# Altium PCB petroskey.PcbDoc (part 2 of 2)
Units mm, origin at the board's own origin, x right, y up, seen from the top; angles counter-clockwise.
Board outline 288 x 108 mm, 2 copper layers (Top Layer, Bottom Layer), stack 1.57 mm thick; 441 components, 333 nets, 1412 pads, 0 vias.
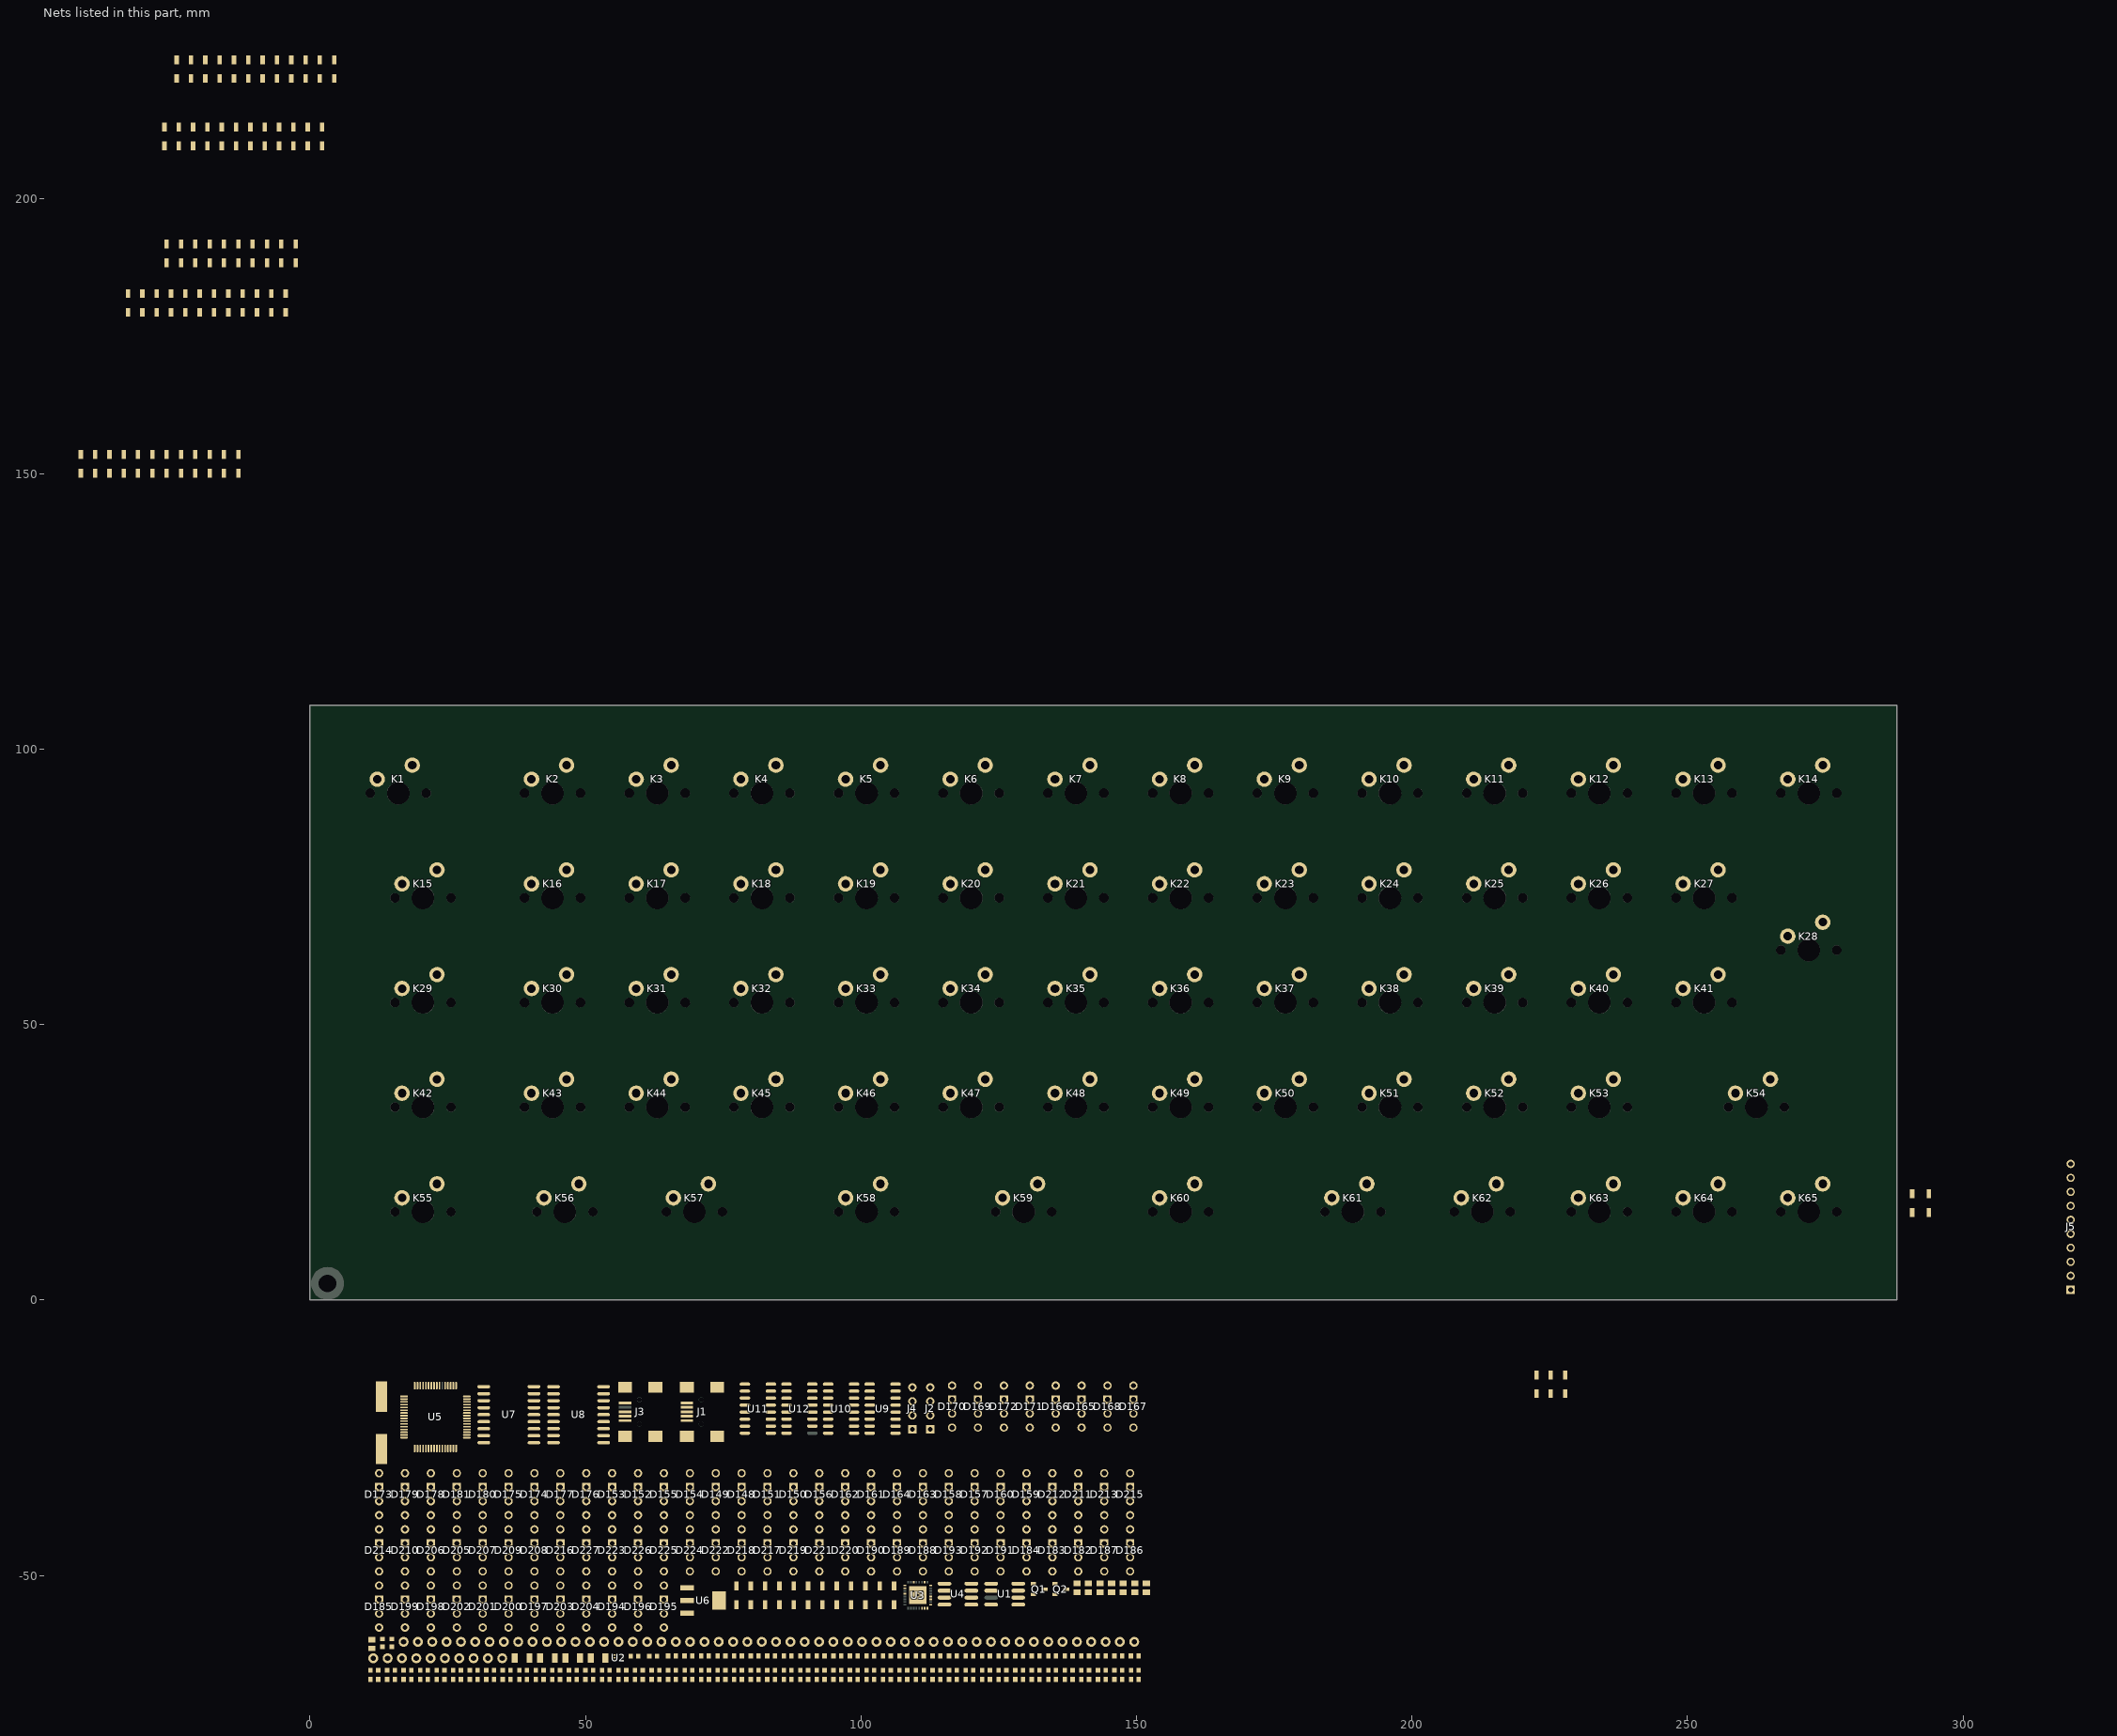
[diagram p2: the nets of this part, all layers, seen from the top]

## Part data
C1: library part "Cap Pol1", "Ceramic X7R 16V"
C2 C3 C4 C5 C7 C8 C9 C10 C12 C17 C18 C19 C20 C23 C25 C26 C27 C28 C29 C30 C31 C32 C33 C34 C35 C36 C37 C38 C39 C40 C41 C42 C43 C44 C45 C46 C47 C48 C49: library part Cap, "Ceramic X7R 50V"
C6 C22 C24: library part "Cap Pol1", "Ceramic X5R 25V"
C11 C13: library part Cap, "Ceramic NP0 +/- 0.1"
C14 C21: library part Cap, "Ceramic X7R 16V"
C15 C16: library part Cap, "Ceramic 6.3V X7R"
C50 C51 C52 C53: library part C, "CER 50V X7R"
D1: library part Diode, "Diode Schottky  low Vf, If 1A (PMEG3010ER; MBRX120LF)"
D2 D3: library part LED0, "LED Green"
D4 D5 D6 D7 D8 D9 D10 D11 D12 D13 D14 D15 D16 D17 D18 D19 D20 D21 D22 D23 D24 D25 D26 D27 D28 D29 D30 D31 D32 D33 D34 D35 D36 D37 D38 D39 D40 D41 D42 D43 D44 D45 D46 D47 D48 D49 D50 D51 D52 D53 D54 D55 D56 D57 D58 D59 D60 D61 D62 D63 D64 D65 D66 D67 D68 D69 D70 D71 D72 D73 D74 D75 D76 D77: library part diode_small, "Diode Schottky  low Vf, If 1A (PMEG3010ER; MBRX120LF)"
D148 D149 D150 D151 D152 D153 D154 D155 D156 D157 D158 D159 D160 D161 D162 D163 D164 D165 D166 D167 D168 D169 D170 D171 D172 D173 D174 D175 D176 D177 D178 D179 D180 D181 D182 D183 D184 D185 D186 D187 D188 D189 D190 D191 D192 D193 D194 D195 D196 D197 D198 D199 D200 D201 D202 D203 D204 D205 D206 D207 D208 D209 D210 D211 D212 D213 D214 D215 D216 D217 D218 D219 D220 D221 D222 D223 D224 D225 D226 D227: library part Led_RGB_THD, "Led RGB Thrue Hole"
J1: library part USB_Con_Type_B_mini_SMT, "Mini USB SMT Type B 5 Contacts"
J2 J4: library part "Header 4", "Pin Header, 1x4, 2.54mm."
J3: library part USB_Con_Type_B_mini_SMT, "Mini USB SMT Type B 5 Contacts (WE 65100516121)"
J5: library part "Header 10", "Header, 10-Pin"
K1 K2 K3 K4 K5 K6 K7 K8 K9 K10 K11 K12 K13 K14 K15 K16 K17 K18 K19 K20 K21 K22 K23 K24 K25 K26 K27 K28 K29 K30 K31 K32 K33 K34 K35 K36 K37 K38 K39 K40 K41 K42 K43 K44 K45 K46 K47 K48 K49 K50 K51 K52 K53 K54 K55 K56 K57 K58 K59 K60 K61 K62 K63 K64 K65: library part SWITCH-RA, "Tactile Switch Right Angle 6x6"
L1 L2 L3 L4 L6 L7 L9: library part Inductor, "WE 742792022"
L5: library part "BEAD_ FERRITE", "Ferrite Beat (WE 7427927218)"
L8: library part Inductor, "Inductor"
Q1 Q2: "BJT NPN"
R1 R2 R3 R4 R5 R6 R7 R9 R10 R11 R12 R13 R14 R15 R16 R17 R18 R19 R20 R21 R22 R23 R24 R25 R26 R27 R28 R29 R30 R31 R32 R33 R34 R35 R36 R37 R38 R39 R40 R41 R42 R43 R44 R45 R46 R47 R48 R49 R50 R51 R52 R53 R54 R55 R56 R57 R58 R59 R60 R61 R62 R63 R64 R65 R66 R67 R68 R69 R70 R71 R72 R73 R74: library part Res1, "Resistor"
R8: library part Resistor_ST, "Resistor"
R75: library part R_0, "Resistor"
Tp1 Tp2 Tp3 Tp4 Tp5 Tp6 Tp7 Tp8 Tp9 Tp10 Tp11 Tp12 Tp13 Tp14 Tp15 Tp16 Tp17 Tp18 Tp19 Tp20 Tp21 Tp22 Tp23 Tp24 Tp25 Tp26 Tp27 Tp28 Tp29 Tp30 Tp31 Tp32 Tp33 Tp34 Tp35 Tp36 Tp37 Tp38 Tp39 Tp40 Tp41 Tp42 Tp43 Tp44 Tp45 Tp46 Tp47 Tp48 Tp49 Tp50 Tp51 Tp52 Tp53 Tp54 Tp55 Tp56 Tp57 Tp58 Tp59 Tp60 Tp61 Tp62: library part Test_point, "Test point"
U1: library part LM75, "Temperature sensor"
U2: library part TVS_Diode_Array
U3: "Serial TTL 232 <-> USB (QFN-32)"
U4: library part EEPROM-SOIC8, "EEPROM"
U6: library part LM1117-FIXED-OUT, "LM1117 LDO Fixed output"
U7 U8: "BJT Darlington array"
U9 U10 U11 U12: library part 74HC595_27, "8-Bit Serial-Input/Serial or Prallel-Output Shift Register with Latched 3-State Outputs"
Y1: library part CRYSTAL-2p, "Crystall"

## Free pads (board coordinates)
  round 6 hole 3.2: Hole(3.175,3)

## Nets (pads, with @x,y where several pads share a name; then routed paths per layer and width w, separated by ;. In a path a pad name is that pad's centre, name@x,y a point inside that pad or via, vN(x,y) a via of type N, cw(c..) or ccw(c..) an arc to the next point about the centre after c; other vN are vias at no path point)
3V3OUT: C10.1 U3.1 U3.16
+3.3V: C4.2 C24.1 C25.2 C50.1 C51.1 C52.1 C53.1 D3.1 L6.1 L9.1 Q1.3 R2.1 R3.1 R4.1 R75.1 Tp3.1 U1.8 U6.2 U6.4 U7.10 U8.10 U9.10 U9.16 U10.10 U10.16 U11.10 U11.16 U12.10 U12.16
+5V: C1.1 C2.1 C5.2 C9.2 C22.1 C23.2 D1.1 D2.1 L1.1 R1.1 Tp4.1 U2.5 U6.3
FTDIUSB_N: J3.2 U3.15
FTDIUSB_P: J3.3 U3.14
GND: C1.2 C2.2 C3.2 C4.1 C5.1 C6.2 C7.2 C8.2 C9.1 C10.2 C11.2 C12.1 C13.2 C14.2 C15.1 C16.1 C17.2 C18.2 C19.2 C20.2 C21.1 C22.2 C23.1 C24.2 C25.1 C50.2 C51.2 C52.2 C53.2 J1.5 J3.5 L2.1 L5.2 L7.1 Q2.2 R6.2 R8.2 R24.1 R26.2 R34.1 R35.1 Tp5.1 Tp6.1 U1.4 U1.5 U1.6 U1.7 U2.2 U3.4 U3.17 U3.20 U3.24 U3.26 U3.GND_PAD U4.1 U4.2 U4.3 U4.4 U4.7 U5.12 U5.18 U5.63 U6.1 U7.9 U8.9 U9.8 U10.8 U11.8 U12.8
NetC3_1: C3.1 J1.1 L1.2
NetC7_1: C7.1 J3.1 L3.2
NetC11_1: C11.1 R22.2 U5.5 Y1.1
NetC13_1: C13.1 R22.1 U5.6 Y1.2
NetC15_2: C15.2 U5.47
NetC16_2: C16.2 U5.31
NetC26_1: C26.1 K1.1 K13.1 K25.1 K37.1 K49.1 K61.1 R36.1 Tp8.1
NetC26_2: C26.2 R36.2 U5.26
NetC27_1: C27.1 K2.1 K14.1 K26.1 K38.1 K50.1 K62.1 R37.1 Tp9.1
NetC27_2: C27.2 R37.2 U5.27
NetC28_1: C28.1 K3.1 K15.1 K27.1 K39.1 K51.1 K63.1 R38.1 Tp10.1
NetC28_2: C28.2 R38.2 U5.55
NetC29_1: C29.1 K4.1 K16.1 K28.1 K40.1 K52.1 K64.1 R39.1 Tp11.1
NetC29_2: C29.2 R39.2 U5.56
NetC30_1: C30.1 K5.1 K17.1 K29.1 K41.1 K53.1 K65.1 R40.1 Tp12.1
NetC30_2: C30.2 R40.2 U5.57
NetC31_1: C31.1 K6.1 K18.1 K30.1 K42.1 K54.1 R41.1 Tp13.1
NetC31_2: C31.2 R41.2 U5.58
NetC32_1: C32.1 K7.1 K19.1 K31.1 K43.1 K55.1 R42.1 Tp14.1
NetC32_2: C32.2 R42.2 U5.59
NetC33_1: C33.1 K8.1 K20.1 K32.1 K44.1 K56.1 R43.1 Tp15.1
NetC33_2: C33.2 R43.2 U5.61
NetC34_1: C34.1 K9.1 K21.1 K33.1 K45.1 K57.1 R44.1 Tp16.1
NetC34_2: C34.2 R44.2 U5.62
NetC35_1: C35.1 K10.1 K22.1 K34.1 K46.1 K58.1 R45.1 Tp17.1
NetC35_2: C35.2 R45.2 U5.33
NetC36_1: C36.1 K11.1 K23.1 K35.1 K47.1 K59.1 R46.1 Tp18.1
NetC36_2: C36.2 R46.2 U5.34
NetC37_1: C37.1 K12.1 K24.1 K36.1 K48.1 K60.1 R47.1 Tp19.1
NetC37_2: C37.2 R47.2 U5.35
NetC38_1: C38.1 D4.1 D5.1 D6.1 D7.1 D8.1 D9.1 D10.1 D11.1 D12.1 D13.1 D14.1 D15.1 R48.1 Tp20.1
NetC38_2: C38.2 R48.2 U5.8
NetC39_1: C39.1 D16.1 D17.1 D18.1 D19.1 D20.1 D21.1 D22.1 D23.1 D24.1 D25.1 D26.1 D27.1 R49.1 Tp21.1
NetC39_2: C39.2 R49.2 U5.9
NetC40_1: C40.1 D28.1 D29.1 D30.1 D31.1 D32.1 D33.1 D34.1 D35.1 D36.1 D37.1 D38.1 D39.1 R50.1 Tp22.1
NetC40_2: C40.2 R50.2 U5.10
NetC41_1: C41.1 D40.1 D41.1 D42.1 D43.1 D44.1 D45.1 D46.1 D47.1 D48.1 D49.1 D50.1 D51.1 R51.1 Tp23.1
NetC41_2: C41.2 R51.2 U5.11
NetC42_1: C42.1 D52.1 D53.1 D54.1 D55.1 D56.1 D57.1 D58.1 D59.1 D60.1 D61.1 D62.1 D63.1 R52.1 Tp24.1
NetC42_2: C42.2 R52.2 U5.24
NetC43_1: C43.1 D64.1 D65.1 D66.1 D67.1 D68.1 D69.1 D70.1 D71.1 D72.1 D73.1 D74.1 D75.1 R53.1 Tp25.1
NetC43_2: C43.2 R53.2 U5.25
NetC44_1: C44.1 D76.1 D77.1 R54.1 Tp26.1
NetC44_2: C44.2 R54.2 U5.37
NetC45_1: C45.1 R55.1 Tp27.1
NetC45_2: C45.2 R55.2 U5.38
NetC46_1: C46.1 R56.1 Tp28.1
NetC46_2: C46.2 R56.2 U5.39
NetC47_1: C47.1 R57.1 Tp29.1
NetC47_2: C47.2 R57.2 U5.40
NetC48_1: C48.1 R58.1 Tp30.1
NetC48_2: C48.2 R58.2 U5.51
NetC49_1: C49.1 R59.1 Tp31.1
NetC49_2: C49.2 R59.2 U5.52
NetD1_2: D1.2 L4.1
NetD2_2: D2.2 R34.2
NetD3_2: D3.2 R35.2
NetD4_2: D4.2 K1.2
NetD5_2: D5.2 K2.2
NetD6_2: D6.2 K3.2
NetD7_2: D7.2 K4.2
NetD8_2: D8.2 K5.2
NetD9_2: D9.2 K6.2
NetD10_2: D10.2 K7.2
NetD11_2: D11.2 K8.2
NetD12_2: D12.2 K9.2
NetD13_2: D13.2 K10.2
NetD14_2: D14.2 K11.2
NetD15_2: D15.2 K12.2
NetD16_2: D16.2 K13.2
NetD17_2: D17.2 K14.2
NetD18_2: D18.2 K15.2
NetD19_2: D19.2 K16.2
NetD20_2: D20.2 K17.2
NetD21_2: D21.2 K18.2
NetD22_2: D22.2 K19.2
NetD23_2: D23.2 K20.2
NetD24_2: D24.2 K21.2
NetD25_2: D25.2 K22.2
NetD26_2: D26.2 K23.2
NetD27_2: D27.2 K24.2
NetD28_2: D28.2 K25.2
NetD29_2: D29.2 K26.2
NetD30_2: D30.2 K27.2
NetD31_2: D31.2 K28.2
NetD32_2: D32.2 K29.2
NetD33_2: D33.2 K30.2
NetD34_2: D34.2 K31.2
NetD35_2: D35.2 K32.2
NetD36_2: D36.2 K33.2
NetD37_2: D37.2 K34.2
NetD38_2: D38.2 K35.2
NetD39_2: D39.2 K36.2
NetD40_2: D40.2 K37.2
NetD41_2: D41.2 K38.2
NetD42_2: D42.2 K39.2
NetD43_2: D43.2 K40.2
NetD44_2: D44.2 K41.2
NetD45_2: D45.2 K42.2
NetD46_2: D46.2 K43.2
NetD47_2: D47.2 K44.2
NetD48_2: D48.2 K45.2
NetD49_2: D49.2 K46.2
NetD50_2: D50.2 K47.2
NetD51_2: D51.2 K48.2
NetD52_2: D52.2 K49.2
NetD53_2: D53.2 K50.2
NetD54_2: D54.2 K51.2
NetD55_2: D55.2 K52.2
NetD56_2: D56.2 K53.2
NetD57_2: D57.2 K54.2
NetD58_2: D58.2 K55.2
NetD59_2: D59.2 K56.2
NetD60_2: D60.2 K57.2
NetD61_2: D61.2 K58.2
NetD62_2: D62.2 K59.2
NetD63_2: D63.2 K60.2
NetD64_2: D64.2 K61.2
NetD65_2: D65.2 K62.2
NetD66_2: D66.2 K63.2
NetD67_2: D67.2 K64.2
NetD68_2: D68.2 K65.2
NetD69_2: D69.2
NetD70_2: D70.2
NetD71_2: D71.2
NetD72_2: D72.2
NetD73_2: D73.2
NetD74_2: D74.2
NetD75_2: D75.2
NetD76_2: D76.2
NetD77_2: D77.2
NetD78_2: 
NetD79_2: 
NetD80_2: 
NetD81_2: 
NetD82_2: 
NetD83_2: 
NetD84_2: 
NetD85_2: 
NetD86_2: 
NetD87_2: 
NetD88_2: 
NetD89_2: 
NetD90_2: 
NetD91_2: 
NetD92_2: 
NetD93_2: 
NetD94_2: 
NetD95_2: 
NetD96_2: 
NetD97_2: 
NetD98_2: 
NetD99_2: 
NetD100_2: 
NetD101_2: 
NetD102_2: 
NetD103_2: 
NetD104_2: 
NetD105_2: 
NetD106_2: 
NetD107_2: 
NetD108_2: 
NetD109_2: 
NetD110_2: 
NetD111_2: 
NetD112_2: 
NetD113_2: 
NetD114_2: 
NetD115_2: 
NetD116_2: 
NetD117_2: 
NetD118_2: 
NetD119_2: 
NetD120_2: 
NetD121_2: 
NetD122_2: 
NetD123_2: 
NetD124_2: 
NetD125_2: 
NetD126_2: 
NetD127_2: 
NetD128_2: 
NetD129_2: 
NetD130_2: 
NetD131_2: 
NetD132_2: 
NetD133_2: 
NetD134_2: 
NetD135_2: 
NetD136_2: 
NetD137_2: 
NetD138_2: 
NetD139_2: 
NetD140_2: 
NetD141_2: 
NetD142_2: 
NetD143_2: 
NetD144_2: 
NetD145_2: 
NetD146_2: 
NetD147_2: 
NetD148_1: D148.1 D149.1 D150.1 D151.1 D152.1 D153.1 D154.1 D155.1 D156.1 D157.1 D158.1 D159.1 D160.1 D161.1 D162.1 D163.1 R60.1 Tp32.1
NetD148_2: D148.2 D164.2 D180.2 D196.2 D212.2 Tp47.1 U7.11
NetD148_3: D148.3 D149.3 D150.3 D151.3 D152.3 D153.3 D154.3 D155.3 D156.3 D157.3 D158.3 D159.3 D160.3 D161.3 D162.3 D163.3 R61.1 Tp33.1
NetD148_4: D148.4 D149.4 D150.4 D151.4 D152.4 D153.4 D154.4 D155.4 D156.4 D157.4 D158.4 D159.4 D160.4 D161.4 D162.4 D163.4 R62.1 Tp34.1
NetD149_2: D149.2 D165.2 D181.2 D197.2 D213.2 Tp48.1 U7.12
NetD150_2: D150.2 D166.2 D182.2 D198.2 D214.2 Tp49.1 U7.13
NetD151_2: D151.2 D167.2 D183.2 D199.2 D215.2 Tp50.1 U7.14
NetD152_2: D152.2 D168.2 D184.2 D200.2 D216.2 Tp51.1 U7.15
NetD153_2: D153.2 D169.2 D185.2 D201.2 D217.2 Tp52.1 U7.16
NetD154_2: D154.2 D170.2 D186.2 D202.2 D218.2 Tp53.1 U7.17
NetD155_2: D155.2 D171.2 D187.2 D203.2 D219.2 Tp54.1 U7.18
NetD156_2: D156.2 D172.2 D188.2 D204.2 D220.2 Tp55.1 U8.11
NetD157_2: D157.2 D173.2 D189.2 D205.2 D221.2 Tp56.1 U8.12
NetD158_2: D158.2 D174.2 D190.2 D206.2 D222.2 Tp57.1 U8.13
NetD159_2: D159.2 D175.2 D191.2 D207.2 D223.2 Tp58.1 U8.14
NetD160_2: D160.2 D176.2 D192.2 D208.2 D224.2 Tp59.1 U8.15
NetD161_2: D161.2 D177.2 D193.2 D209.2 D225.2 Tp60.1 U8.16
NetD162_2: D162.2 D178.2 D194.2 D210.2 D226.2 Tp61.1 U8.17
NetD163_2: D163.2 D179.2 D195.2 D211.2 D227.2 Tp62.1 U8.18
NetD164_1: D164.1 D165.1 D166.1 D167.1 D168.1 D169.1 D170.1 D171.1 D172.1 D173.1 D174.1 D175.1 D176.1 D177.1 D178.1 D179.1 R63.1 Tp35.1
NetD164_3: D164.3 D165.3 D166.3 D167.3 D168.3 D169.3 D170.3 D171.3 D172.3 D173.3 D174.3 D175.3 D176.3 D177.3 D178.3 D179.3 R64.1 Tp36.1
NetD164_4: D164.4 D165.4 D166.4 D167.4 D168.4 D169.4 D170.4 D171.4 D172.4 D173.4 D174.4 D175.4 D176.4 D177.4 D178.4 D179.4 R65.1 Tp37.1
NetD180_1: D180.1 D181.1 D182.1 D183.1 D184.1 D185.1 D186.1 D187.1 D188.1 D189.1 D190.1 D191.1 D192.1 D193.1 D194.1 D195.1 R66.1 Tp38.1
NetD180_3: D180.3 R67.1 Tp39.1
NetD180_4: D180.4 D181.4 D182.4 D183.4 D184.4 D185.4 D186.4 D187.4 D188.4 D189.4 D190.4 D191.4 D192.4 D193.4 D194.4 D195.4 R68.1 Tp40.1
NetD181_3: D181.3 D182.3 D183.3 D184.3 D185.3 D186.3 D187.3 D188.3 D189.3 D190.3 D191.3 D192.3 D193.3 D194.3 D195.3
NetD196_1: D196.1 D197.1 D198.1 D199.1 D200.1 D201.1 D202.1 D203.1 D204.1 D205.1 D206.1 D207.1 D208.1 D209.1 D210.1 D211.1 R69.1 Tp41.1
NetD196_3: D196.3 D197.3 D198.3 D199.3 D200.3 D201.3 D202.3 D203.3 D204.3 D205.3 D206.3 D207.3 D208.3 D209.3 D210.3 D211.3 D212.3 D213.3 D214.3 D215.3 D216.3 D217.3 D218.3 D219.3 D220.3 D221.3 D222.3 D223.3 D224.3 D225.3 D226.3 D227.3 R70.1 R73.1 Tp42.1 Tp45.1
NetD196_4: D196.4 D197.4 D198.4 D199.4 D200.4 D201.4 D202.4 D203.4 D204.4 D205.4 D206.4 D207.4 D208.4 D209.4 D210.4 D211.4 R71.1 Tp43.1
NetD212_1: D212.1 D213.1 D214.1 D215.1 D216.1 D217.1 D218.1 D219.1 D220.1 D221.1 D222.1 D223.1 D224.1 D225.1 D226.1 D227.1 R72.1 Tp44.1
NetD212_4: D212.4 D213.4 D214.4 D215.4 D216.4 D217.4 D218.4 D219.4 D220.4 D221.4 D222.4 D223.4 D224.4 D225.4 D226.4 D227.4 R74.1 Tp46.1
NetJ1_4: J1.4 R8.1
NetJ1_Z1: J1.Z1 J1.Z2 J1.Z3 J1.Z4 L2.2
NetJ2_1: J2.1 J4.1 R23.2 U5.7
NetJ2_2: J2.2 R9.1
NetJ2_3: J2.3 R10.1
NetJ2_4: J2.4 R11.1
NetJ4_2: J4.2 R24.2 U5.60
NetJ4_3: J4.3 R12.1 R27.2
NetJ4_4: J4.4 R13.1 R25.2
NetJ5_1: J5.1 R14.1
NetJ5_2: J5.2 R15.1
NetJ5_3: J5.3 R16.1
NetJ5_4: J5.4 R17.1
NetJ5_5: J5.5 R18.1
NetJ5_6: J5.6 R19.1
NetJ5_7: J5.7 R20.1
NetJ5_8: J5.8 R21.1
NetJ5_9: J5.9 L6.2
NetJ5_10: J5.10 L7.2
NetL8_2: L8.2 U5.13
NetQ1_1: Q1.1 Q2.3 R1.2 R6.1
NetQ1_2: Q1.2 R7.1
NetQ2_1: Q2.1 R2.2 R5.1
NetR3_2: R3.2 R15.2 U1.1
NetR4_2: R4.2 R14.2 U1.2
NetR5_2: R5.2 U5.53
NetR9_2: R9.2
NetR10_2: R10.2
NetR11_2: R11.2
NetR12_2: R12.2 U3.30
NetR13_2: R13.2 U3.2
NetR16_2: R16.2 U5.14
NetR17_2: R17.2 U5.15
NetR18_2: R18.2 U5.20
NetR19_2: R19.2 U5.21
NetR20_2: R20.2 U5.22
NetR21_2: R21.2 U5.23
NetR25_1: R25.1 Tp1.1 U5.16
NetR26_1: R26.1 U5.28
NetR27_1: R27.1 Tp2.1 U5.17
NetR28_1: R28.1 R32.1 U4.5
NetR29_1: R29.1 R33.1 U4.6
NetR30_1: R30.1 U5.42
NetR30_2: R30.2
NetR31_1: R31.1 U5.43
NetR31_2: R31.2
NetR32_2: R32.2 U5.29
NetR33_2: R33.2 U5.30
NetR60_2: R60.2 U9.15
NetR61_2: R61.2 U9.1
NetR62_2: R62.2 U9.2
NetR63_2: R63.2 U9.3
NetR64_2: R64.2 U9.4
NetR65_2: R65.2 U9.5
NetR66_2: R66.2 U9.6
NetR67_2: R67.2 U9.7
NetR68_2: R68.2 U10.15
NetR69_2: R69.2 U10.1
NetR70_2: R70.2 U10.2
NetR71_2: R71.2 U10.3
NetR72_2: R72.2 U10.4
NetR73_2: R73.2 U10.5
NetR74_2: R74.2 U10.6
NetR75_2: R75.2 U5.41 U5.50 U9.11 U9.13 U10.11 U10.13 U11.11 U11.13 U12.13
NetU5_2: U5.2
NetU5_3: U5.3
NetU5_4: U5.4
NetU5_36: U5.36
NetU5_46: U5.46 U9.14
NetU5_49: U5.49 U9.12 U10.12 U11.12 U12.11 U12.12
NetU7_1: U7.1 U11.7
NetU7_2: U7.2 U11.6
NetU7_3: U7.3 U11.5
NetU7_4: U7.4 U11.4
NetU7_5: U7.5 U11.3
NetU7_6: U7.6 U11.2
NetU7_7: U7.7 U11.1
NetU7_8: U7.8 U11.15
NetU8_1: U8.1 U12.7
NetU8_2: U8.2 U12.6
NetU8_3: U8.3 U12.5
NetU8_4: U8.4 U12.4
NetU8_5: U8.5 U12.3
NetU8_6: U8.6 U12.2
NetU8_7: U8.7 U12.1
NetU8_8: U8.8 U12.15
NetU9_9: U9.9 U10.14
NetU10_7: U10.7
NetU10_9: U10.9 U11.14
NetU11_9: U11.9 U12.14
SHLD: J3.Z1 J3.Z2 J3.Z3 J3.Z4 L5.1
USB_N: J1.2 U2.1 U2.6 U5.44
USB_P: J1.3 R7.2 U2.3 U2.4 U5.45
VCC_USB: C6.1 C8.1 L3.1 L4.2 Tp7.1 U3.19
VDD: C12.2 C14.1 C17.1 C18.1 C19.1 C20.1 C21.2 L8.1 L9.2 R23.1 R28.2 R29.2 U4.8 U5.1 U5.19 U5.32 U5.48 U5.64
pads on no net: J1. J3. J3.4 K1.Hole K2.Hole K3.Hole K4.Hole K5.Hole K6.Hole K7.Hole K8.Hole K9.Hole K10.Hole K11.Hole K12.Hole K13.Hole K14.Hole K15.Hole K16.Hole K17.Hole K18.Hole K19.Hole K20.Hole K21.Hole K22.Hole K23.Hole K24.Hole K25.Hole K26.Hole K27.Hole K28.Hole K29.Hole K30.Hole K31.Hole K32.Hole K33.Hole K34.Hole K35.Hole K36.Hole K37.Hole K38.Hole K39.Hole K40.Hole K41.Hole K42.Hole K43.Hole K44.Hole K45.Hole K46.Hole K47.Hole K48.Hole K49.Hole K50.Hole K51.Hole K52.Hole K53.Hole K54.Hole K55.Hole K56.Hole K57.Hole K58.Hole K59.Hole K60.Hole K61.Hole K62.Hole K63.Hole K64.Hole K65.Hole U1.3 U3.3 U3.5 U3.6 U3.7 U3.8 U3.9 U3.10 U3.11 U3.12 U3.13 U3.18 U3.21 U3.22 U3.23 U3.25 U3.27 U3.28 U3.29 U3.31 U3.32 U5.54 U12.9

## Silkscreen, mask and mechanical layers (free items; w line width, h text height)
Outline:
  the board outline again, w0.2
Drawing:
  drawing of 651 lines, arcs and shapes, not listed
  text "270" at 141.5,144.625 h2.5
  text "13.5" at 4.111,130.625 h2.5
  text "10" at 28.75,126.625 h2.5
  text "9" at 3.944,124.625 h2.5
  text "14" at 28.611,120.625 h2.5
  text "5" at 52.944,120.625 h2.5
  text "1" at 72.222,120.625 h2.5
  text "18" at 99.75,120.625 h2.5
  text "9.5" at 30.306,115.625 h2.5
  text "288" at 141.5,114.625 h2.5
  text "1.6" at 30.663,102.349 h2.5 r49.4
  text "9" at -19.431,102.25 h2.5 r90
  text "6" at 32.569,93.75 h2.5 r90
  text "14" at -14.264,90.75 h2.5 r90
  text "18" at 310.875,90.75 h2.5 r90
  text "7" at 32.944,82.625 h2.5
  text "5" at -19.431,81.25 h2.5 r90
  text "7.9" at 260.181,79.8 h2.5 r90
  text "14.5" at 299.347,76.5 h2.5 r90
  text "37" at 310.597,62.25 h2.5 r90
  text "108" at -10.097,52.75 h2.5 r90
  text "90" at 320.597,52.75 h2.5 r90
  text "14.5" at 299.347,48 h2.5 r90
  text "18" at 310.875,33.75 h2.5 r90
  text "0.55" at 114.208,25.292 h2.5 r90
  text "18" at -19.125,14.75 h2.5 r90
  text "14.2" at 78.347,14.1 h2.5 r90
  text "1.6" at 5.085,8.153 h2.5 r45
  text "3.3" at 91.325,-1.375 h2.5
  text "4" at 1.306,-5.375 h2.5
  text "27" at 18.972,-5.375 h2.5
  text "3.3" at 94.625,-5.375 h2.5
  text "37" at 156.472,-5.375 h2.5
  text "22.5" at 209.833,-5.375 h2.5
  text "11.75" at 30.042,-12.375 h2.5
  text "1.5" at 83.125,-12.375 h2.5
  text "15" at 142.25,-12.375 h2.5
  text "17.25" at 170.014,-12.375 h2.5
  text "9.5" at 199.056,-12.375 h2.5
  text "7.25" at 220.458,-12.375 h2.5
  text "14.5" at 245.472,-12.375 h2.5
  text "18.5" at 276.111,-12.375 h2.5
  text "37" at 260.972,-17.375 h2.5
  text "Mechanical Characteristics" at 213.175,-42.127 h5
Assembly_top:
  drawing of 1566 lines, arcs and shapes, not listed
  text "DevelKey Layout" at 57,171 h10
  text "Esc" at 11,99 h4
  text "1" at 39,99 h4
  text "2" at 58,99 h4
  text "3" at 77,99 h4
  text "4" at 96,99 h4
  text "5" at 115,99 h4
  text "6" at 134,99 h4
  text "7" at 153,99 h4
  text "8" at 172,99 h4
  text "9" at 191,99 h4
  text "0" at 210,99 h4
  text "_" at 229,99 h4
  text "+" at 248,99 h4
  text "Bksp" at 266,99 h4
  text "Tab" at 11,80 h4
  text "Q" at 39,80 h4
  text "W" at 58,80 h4
  text "E" at 77,80 h4
  text "R" at 96,80 h4
  text "T" at 115,80 h4
  text "Y" at 134,80 h4
  text "U" at 153,80 h4
  text "I" at 173,80 h4
  text "O" at 191,80 h4
  text "P" at 210,80 h4
  text "{" at 229,80 h4
  text "}" at 248,80 h4
  text "Ent" at 267,79 h4
  text "Caps" at 11,61 h4
  text "A" at 39,61 h4
  text "S" at 58,61 h4
  text "D" at 77,61 h4
  text "F" at 96,61 h4
  text "G" at 115,61 h4
  text "H" at 134,61 h4
  text "J" at 153,61 h4
  text "K" at 172,61 h4
  text "L" at 191,61 h4
  text ":" at 210,61 h4
  text "|" at 248,61 h4
  text "DevelKey Layout" at 670.175,57.5 h10
  text "Loc" at 11,56.96 h4
  text "Shift" at 11,42 h4
  text "~" at 39,42 h4
  text "Z" at 58,42 h4
  text "X" at 77,42 h4
  text "C" at 96,42 h4
  text "V" at 115,42 h4
  text "B" at 134,42 h4
  text "N" at 153,42 h4
  text "M" at 172,42 h4
  text "<" at 191,42 h4
  text ">" at 210,42 h4
  text "?" at 229,42 h4
  text "Shift" at 248,42 h4
  text "Ctrl" at 11,23 h4
  text "Fn1" at 39,23 h4
  text "Alt" at 63,23 h4
  text "Fn2" at 182,23 h4
  text "Alt" at 205,23 h4
  text "Meta" at 228,23 h4
  text "Menu" at 247,23 h4
  text "Ctrl" at 267,23 h4
  text "Esc" at 507.175,22.5 h4
  text "1" at 535.175,22.5 h4
  text "2" at 554.175,22.5 h4
  text "3" at 573.175,22.5 h4
  text "4" at 592.175,22.5 h4
  text "5" at 611.175,22.5 h4
  text "6" at 630.175,22.5 h4
  text "7" at 649.175,22.5 h4
  text "8" at 668.175,22.5 h4
  text "9" at 687.175,22.5 h4
  text "0" at 706.175,22.5 h4
  text "_" at 725.175,22.5 h4
  text "+" at 744.175,22.5 h4
  text "Bksp" at 762.175,22.5 h4
  text "!!" at 129,19 h4
  text "Tab" at 507.175,3.5 h4
  text "Q" at 535.175,3.5 h4
  text "W" at 554.175,3.5 h4
  text "E" at 573.175,3.5 h4
  text "R" at 592.175,3.5 h4
  text "T" at 611.175,3.5 h4
  text "Y" at 630.175,3.5 h4
  text "U" at 649.175,3.5 h4
  text "I" at 669.175,3.5 h4
  text "O" at 687.175,3.5 h4
  text "P" at 706.175,3.5 h4
  text "{" at 725.175,3.5 h4
  text "}" at 744.175,3.5 h4
  text "Ent" at 763.175,2.5 h4
  text "Caps" at 507.175,-15.5 h4
  text "A" at 535.175,-15.5 h4
  text "S" at 554.175,-15.5 h4
  text "D" at 573.175,-15.5 h4
  text "F" at 592.175,-15.5 h4
  text "G" at 611.175,-15.5 h4
  text "H" at 630.175,-15.5 h4
  text "J" at 649.175,-15.5 h4
  text "K" at 668.175,-15.5 h4
  text "L" at 687.175,-15.5 h4
  text ":" at 706.175,-15.5 h4
  text "|" at 744.175,-15.5 h4
  text "Loc" at 507.175,-19.54 h4
  text "Shift" at 507.175,-34.5 h4
  text "~" at 535.175,-34.5 h4
  text "Z" at 554.175,-34.5 h4
  text "X" at 573.175,-34.5 h4
  text "C" at 592.175,-34.5 h4
  text "V" at 611.175,-34.5 h4
  text "B" at 630.175,-34.5 h4
  text "N" at 649.175,-34.5 h4
  text "M" at 668.175,-34.5 h4
  text "<" at 687.175,-34.5 h4
  text ">" at 706.175,-34.5 h4
  text "?" at 725.175,-34.5 h4
  text "Shift" at 744.175,-34.5 h4
  text "Assembly TOP" at 213.175,-42 h5
  text "Ctrl" at 507.175,-53.5 h4
  text "Fn1" at 535.175,-53.5 h4
  text "Alt" at 559.175,-53.5 h4
  text "Fn2" at 678.175,-53.5 h4
  text "Alt" at 701.175,-53.5 h4
  text "Meta" at 724.175,-53.5 h4
  text "Menu" at 743.175,-53.5 h4
  text "Ctrl" at 763.175,-53.5 h4
  text "!!" at 625.175,-57.5 h4
Assembly_bot:
  text "Assembly Bottom" at 61.175,-42.2 h5
Note_top:
  text "Note TOP" at 213.175,-42 h5
Note_bot:
  lines w0.013: 326.175,106 326.175,214 614.175,214 614.175,106 326.175,106 ; 496.175,-76.5 496.175,31.5 784.175,31.5 784.175,-76.5 496.175,-76.5
  text "Note Bottom" at 61.175,-42.205 h5
PCB_Note:
  lines w0.25: 172.675,-16 203.675,-16 ; 180.675,-49.5 180.675,-46.5 180.675,-43.5 180.675,-40.5 180.675,-37.5 180.675,-34.5 180.675,-31.5 180.675,-28.5 180.675,-25.5 180.675,-22.5 180.675,-19.5 180.675,-16.5 ; 203.675,-46.5 172.675,-46.5 ; 203.675,-43.5 172.675,-43.5 ; 203.675,-40.5 172.675,-40.5 ; 203.675,-37.5 172.675,-37.5 ; 203.675,-34.5 172.675,-34.5 ; 203.675,-31.5 172.675,-31.5 ; 203.675,-28.5 172.675,-28.5 ; 203.675,-25.5 172.675,-25.5 ; 203.675,-22.5 172.675,-22.5 ; 203.675,-19.5 172.675,-19.5 ; 172.675,-46.5 172.675,-43.5 ; 172.675,-46.5 172.675,-49.5 203.675,-49.5 203.675,-16.5 ; 172.675,-43.5 172.675,-40.5 ; 172.675,-40.5 172.675,-37.5 ; 172.675,-37.5 172.675,-34.5 ; 172.675,-34.5 172.675,-31.5 ; 172.675,-31.5 172.675,-28.5 ; 172.675,-28.5 172.675,-25.5 ; 172.675,-25.5 172.675,-22.5 ; 172.675,-22.5 172.675,-19.5 ; 172.675,-19.5 172.675,-16.5 ; 172.675,-16.5 203.675,-16.5 ; 172.675,-16.5 172.675,-12.5 203.675,-12.5 203.675,-16.5
  lines w0.3: 212.675,-55 212.675,-43 ; 212.675,-52 280.175,-52 ; 212.675,-49 280.175,-49 ; 212.675,-46 280.175,-46 ; 228.675,-55 228.675,-43 ; 270.175,-55 270.175,-52 ; 280.175,-43 228.675,-43 ; 280.175,-38 212.675,-38 212.675,-43 ; 212.675,-43 228.675,-43
  lines w0.35: -9.825,-60 -9.825,150 285.175,150 285.175,-60 -9.825,-60 ; -4.825,-55 -4.825,145 280.175,145 280.175,-55 -4.825,-55
  text "- Plugged Vias" at 170.175,-6.75 h5
  text "File Layer names:" at 173.175,-15 h3.5
  text "GTO" at 173.175,-19 h3
  text "Top Overlay" at 182.175,-19 h3
  text "GTP" at 173.175,-22 h3
  text "Top Paste" at 182.175,-22 h3
  text "GTS" at 173.175,-25 h3
  text "Top Solder" at 182.175,-25 h3
  text "GTL" at 173.175,-28 h3
  text "Top Layer" at 182.175,-28 h3
  text "GBL" at 173.175,-31 h3
  text "Bottom Layer" at 182.175,-31 h3
  text "GBS" at 173.175,-34 h3
  text "Bottom Solder" at 182.175,-34 h3
  text "GBP" at 173.175,-37 h3
  text "Bottom Paste" at 182.175,-37 h3
  text "GBO" at 173.175,-40 h3
  text "Bottom Overlay" at 182.175,-40 h3
  text "PCB Note" at 213.175,-42 h5
  text "Board Name" at 213.675,-45.5 h3
  text "Petroskey" at 229.675,-45.5 h3
  text "GM1" at 173.175,-46 h3
  text "Outline" at 182.175,-46 h3
  text "Author" at 213.675,-48.5 h3
  text "Daniele Basile <asterix@develer.com>" at 229.675,-48.5 h3
  text "GM7" at 173.175,-49 h3
  text "PCB_Note" at 182.175,-49 h3
  text "Date" at 213.675,-51.5 h3
  text "07/08/2016" at 229.675,-51.5 h3
  text "Revision" at 213.675,-54.5 h3
  text "A" at 229.675,-54.5 h3
  text "A3" at 272.175,-54.5 h3
TitleBlock_top:
  lines w0.3: 212.675,-55 212.675,-43 ; 212.675,-52 280.175,-52 ; 212.675,-49 280.175,-49 ; 212.675,-46 280.175,-46 ; 228.675,-55 228.675,-43 ; 270.175,-55 270.175,-52 ; 280.175,-43 228.675,-43 ; 280.175,-38 212.675,-38 212.675,-43 ; 212.675,-43 228.675,-43
  lines w0.35: -9.825,-60 -9.825,150 285.175,150 285.175,-60 -9.825,-60 ; -4.825,-55 -4.825,145 280.175,145 280.175,-55 -4.825,-55
  text "Board Name" at 213.675,-45.5 h3
  text "Petroskey" at 229.675,-45.5 h3
  text "Author" at 213.675,-48.5 h3
  text "Daniele Basile <asterix@develer.com>" at 229.675,-48.5 h3
  text "Date" at 213.675,-51.5 h3
  text "07/08/2016" at 229.675,-51.5 h3
  text "Revision" at 213.675,-54.5 h3
  text "A" at 229.675,-54.5 h3
  text "A4" at 272.175,-54.5 h3
TitleBlock_bot:
  lines w0.3: -4.825,-52 62.675,-52 ; -4.825,-49 62.675,-49 ; -4.825,-46 62.675,-46 ; -4.825,-43 46.675,-43 ; -4.825,-38 62.675,-38 62.675,-43 ; 5.175,-55 5.175,-52 ; 46.675,-55 46.675,-43 ; 62.675,-55 62.675,-43 ; 46.675,-43 62.675,-43
  lines w0.35: -9.825,-60 -9.825,150 285.175,150 285.175,-60 -9.825,-60 ; -4.825,-55 -4.825,145 280.175,145 280.175,-55 -4.825,-55
  text "Petroskey" at 45.675,-45.5 h3
  text "Board Name" at 61.675,-45.5 h3
  text "Daniele Basile <asterix@develer.com>" at 45.675,-48.5 h3
  text "Author" at 61.675,-48.5 h3
  text "7/8/2016" at 45.675,-51.5 h3
  text "Date" at 61.675,-51.5 h3
  text "A4" at 3.175,-54.5 h3
  text "A" at 45.675,-54.5 h3
  text "Revision" at 61.675,-54.5 h3

## Text inside footprints (layer, text, board x,y; h text height)
D2: Assembly_top "K" at 63.15,-64.454 h0.5
D3: Assembly_top "K" at 59.75,-64.454 h0.5
D148: Assembly_top "k" at 79.525,-33.754 h1 r90; Note_top "k" at 78.025,-33.754 h1 r90; Top Overlay "K" at 77.325,-33.754 h1.2 r90
D149: Assembly_top "k" at 74.825,-33.754 h1 r90; Note_top "k" at 73.325,-33.754 h1 r90; Top Overlay "K" at 72.625,-33.754 h1.2 r90
D150: Assembly_top "k" at 88.925,-33.754 h1 r90; Note_top "k" at 87.425,-33.754 h1 r90; Top Overlay "K" at 86.725,-33.754 h1.2 r90
D151: Assembly_top "k" at 84.225,-33.754 h1 r90; Note_top "k" at 82.725,-33.754 h1 r90; Top Overlay "K" at 82.025,-33.754 h1.2 r90
D152: Assembly_top "k" at 60.725,-33.754 h1 r90; Note_top "k" at 59.225,-33.754 h1 r90; Top Overlay "K" at 58.525,-33.754 h1.2 r90
D153: Assembly_top "k" at 56.025,-33.754 h1 r90; Note_top "k" at 54.525,-33.754 h1 r90; Top Overlay "K" at 53.825,-33.754 h1.2 r90
D154: Assembly_top "k" at 70.125,-33.754 h1 r90; Note_top "k" at 68.625,-33.754 h1 r90; Top Overlay "K" at 67.925,-33.754 h1.2 r90
D155: Assembly_top "k" at 65.425,-33.754 h1 r90; Note_top "k" at 63.925,-33.754 h1 r90; Top Overlay "K" at 63.225,-33.754 h1.2 r90
D156: Assembly_top "k" at 93.625,-33.754 h1 r90; Note_top "k" at 92.125,-33.754 h1 r90; Top Overlay "K" at 91.425,-33.754 h1.2 r90
D157: Assembly_top "k" at 121.825,-33.754 h1 r90; Note_top "k" at 120.325,-33.754 h1 r90; Top Overlay "K" at 119.625,-33.754 h1.2 r90
D158: Assembly_top "k" at 117.125,-33.754 h1 r90; Note_top "k" at 115.625,-33.754 h1 r90; Top Overlay "K" at 114.925,-33.754 h1.2 r90
D159: Assembly_top "k" at 131.225,-33.754 h1 r90; Note_top "k" at 129.725,-33.754 h1 r90; Top Overlay "K" at 129.025,-33.754 h1.2 r90
D160: Assembly_top "k" at 126.525,-33.754 h1 r90; Note_top "k" at 125.025,-33.754 h1 r90; Top Overlay "K" at 124.325,-33.754 h1.2 r90
D161: Assembly_top "k" at 103.025,-33.754 h1 r90; Note_top "k" at 101.525,-33.754 h1 r90; Top Overlay "K" at 100.825,-33.754 h1.2 r90
D162: Assembly_top "k" at 98.325,-33.754 h1 r90; Note_top "k" at 96.825,-33.754 h1 r90; Top Overlay "K" at 96.125,-33.754 h1.2 r90
D163: Assembly_top "k" at 112.425,-33.754 h1 r90; Note_top "k" at 110.925,-33.754 h1 r90; Top Overlay "K" at 110.225,-33.754 h1.2 r90
D164: Assembly_top "k" at 107.725,-33.754 h1 r90; Note_top "k" at 106.225,-33.754 h1 r90; Top Overlay "K" at 105.525,-33.754 h1.2 r90
D165: Assembly_top "k" at 141.225,-17.854 h1 r90; Note_top "k" at 139.725,-17.854 h1 r90; Top Overlay "K" at 139.025,-17.854 h1.2 r90
D166: Assembly_top "k" at 136.525,-17.854 h1 r90; Note_top "k" at 135.025,-17.854 h1 r90; Top Overlay "K" at 134.325,-17.854 h1.2 r90
D167: Assembly_top "k" at 150.625,-17.854 h1 r90; Note_top "k" at 149.125,-17.854 h1 r90; Top Overlay "K" at 148.425,-17.854 h1.2 r90
D168: Assembly_top "k" at 145.925,-17.854 h1 r90; Note_top "k" at 144.425,-17.854 h1 r90; Top Overlay "K" at 143.725,-17.854 h1.2 r90
D169: Assembly_top "k" at 122.425,-17.854 h1 r90; Note_top "k" at 120.925,-17.854 h1 r90; Top Overlay "K" at 120.225,-17.854 h1.2 r90
D170: Assembly_top "k" at 117.725,-17.854 h1 r90; Note_top "k" at 116.225,-17.854 h1 r90; Top Overlay "K" at 115.525,-17.854 h1.2 r90
D171: Assembly_top "k" at 131.825,-17.854 h1 r90; Note_top "k" at 130.325,-17.854 h1 r90; Top Overlay "K" at 129.625,-17.854 h1.2 r90
D172: Assembly_top "k" at 127.125,-17.854 h1 r90; Note_top "k" at 125.625,-17.854 h1 r90; Top Overlay "K" at 124.925,-17.854 h1.2 r90
D173: Assembly_top "k" at 13.725,-33.754 h1 r90; Note_top "k" at 12.225,-33.754 h1 r90; Top Overlay "K" at 11.525,-33.754 h1.2 r90
D174: Assembly_top "k" at 41.925,-33.754 h1 r90; Note_top "k" at 40.425,-33.754 h1 r90; Top Overlay "K" at 39.725,-33.754 h1.2 r90
D175: Assembly_top "k" at 37.225,-33.754 h1 r90; Note_top "k" at 35.725,-33.754 h1 r90; Top Overlay "K" at 35.025,-33.754 h1.2 r90
D176: Assembly_top "k" at 51.325,-33.754 h1 r90; Note_top "k" at 49.825,-33.754 h1 r90; Top Overlay "K" at 49.125,-33.754 h1.2 r90
D177: Assembly_top "k" at 46.625,-33.754 h1 r90; Note_top "k" at 45.125,-33.754 h1 r90; Top Overlay "K" at 44.425,-33.754 h1.2 r90
D178: Assembly_top "k" at 23.125,-33.754 h1 r90; Note_top "k" at 21.625,-33.754 h1 r90; Top Overlay "K" at 20.925,-33.754 h1.2 r90
D179: Assembly_top "k" at 18.425,-33.754 h1 r90; Note_top "k" at 16.925,-33.754 h1 r90; Top Overlay "K" at 16.225,-33.754 h1.2 r90
D180: Assembly_top "k" at 32.525,-33.754 h1 r90; Note_top "k" at 31.025,-33.754 h1 r90; Top Overlay "K" at 30.325,-33.754 h1.2 r90
D181: Assembly_top "k" at 27.825,-33.754 h1 r90; Note_top "k" at 26.325,-33.754 h1 r90; Top Overlay "K" at 25.625,-33.754 h1.2 r90
D182: Assembly_top "k" at 140.625,-43.954 h1 r90; Note_top "k" at 139.125,-43.954 h1 r90; Top Overlay "K" at 138.425,-43.954 h1.2 r90
D183: Assembly_top "k" at 135.925,-43.954 h1 r90; Note_top "k" at 134.425,-43.954 h1 r90; Top Overlay "K" at 133.725,-43.954 h1.2 r90
D184: Assembly_top "k" at 131.225,-43.954 h1 r90; Note_top "k" at 129.725,-43.954 h1 r90; Top Overlay "K" at 129.025,-43.954 h1.2 r90
D185: Assembly_top "k" at 13.725,-54.154 h1 r90; Note_top "k" at 12.225,-54.154 h1 r90; Top Overlay "K" at 11.525,-54.154 h1.2 r90
D186: Assembly_top "k" at 150.025,-43.954 h1 r90; Note_top "k" at 148.525,-43.954 h1 r90; Top Overlay "K" at 147.825,-43.954 h1.2 r90
D187: Assembly_top "k" at 145.325,-43.954 h1 r90; Note_top "k" at 143.825,-43.954 h1 r90; Top Overlay "K" at 143.125,-43.954 h1.2 r90
D188: Assembly_top "k" at 112.425,-43.954 h1 r90; Note_top "k" at 110.925,-43.954 h1 r90; Top Overlay "K" at 110.225,-43.954 h1.2 r90
D189: Assembly_top "k" at 107.725,-43.954 h1 r90; Note_top "k" at 106.225,-43.954 h1 r90; Top Overlay "K" at 105.525,-43.954 h1.2 r90
D190: Assembly_top "k" at 103.025,-43.954 h1 r90; Note_top "k" at 101.525,-43.954 h1 r90; Top Overlay "K" at 100.825,-43.954 h1.2 r90
D191: Assembly_top "k" at 126.525,-43.954 h1 r90; Note_top "k" at 125.025,-43.954 h1 r90; Top Overlay "K" at 124.325,-43.954 h1.2 r90
D192: Assembly_top "k" at 121.825,-43.954 h1 r90; Note_top "k" at 120.325,-43.954 h1 r90; Top Overlay "K" at 119.625,-43.954 h1.2 r90
D193: Assembly_top "k" at 117.125,-43.954 h1 r90; Note_top "k" at 115.625,-43.954 h1 r90; Top Overlay "K" at 114.925,-43.954 h1.2 r90
D194: Assembly_top "k" at 56.025,-54.154 h1 r90; Note_top "k" at 54.525,-54.154 h1 r90; Top Overlay "K" at 53.825,-54.154 h1.2 r90
D195: Assembly_top "k" at 65.425,-54.154 h1 r90; Note_top "k" at 63.925,-54.154 h1 r90; Top Overlay "K" at 63.225,-54.154 h1.2 r90
D196: Assembly_top "k" at 60.725,-54.154 h1 r90; Note_top "k" at 59.225,-54.154 h1 r90; Top Overlay "K" at 58.525,-54.154 h1.2 r90
D197: Assembly_top "k" at 41.925,-54.154 h1 r90; Note_top "k" at 40.425,-54.154 h1 r90; Top Overlay "K" at 39.725,-54.154 h1.2 r90
D198: Assembly_top "k" at 23.125,-54.154 h1 r90; Note_top "k" at 21.625,-54.154 h1 r90; Top Overlay "K" at 20.925,-54.154 h1.2 r90
D199: Assembly_top "k" at 18.425,-54.154 h1 r90; Note_top "k" at 16.925,-54.154 h1 r90; Top Overlay "K" at 16.225,-54.154 h1.2 r90
D200: Assembly_top "k" at 37.225,-54.154 h1 r90; Note_top "k" at 35.725,-54.154 h1 r90; Top Overlay "K" at 35.025,-54.154 h1.2 r90
D201: Assembly_top "k" at 32.525,-54.154 h1 r90; Note_top "k" at 31.025,-54.154 h1 r90; Top Overlay "K" at 30.325,-54.154 h1.2 r90
D202: Assembly_top "k" at 27.825,-54.154 h1 r90; Note_top "k" at 26.325,-54.154 h1 r90; Top Overlay "K" at 25.625,-54.154 h1.2 r90
D203: Assembly_top "k" at 46.625,-54.154 h1 r90; Note_top "k" at 45.125,-54.154 h1 r90; Top Overlay "K" at 44.425,-54.154 h1.2 r90
D204: Assembly_top "k" at 51.325,-54.154 h1 r90; Note_top "k" at 49.825,-54.154 h1 r90; Top Overlay "K" at 49.125,-54.154 h1.2 r90
D205: Assembly_top "k" at 27.825,-43.954 h1 r90; Note_top "k" at 26.325,-43.954 h1 r90; Top Overlay "K" at 25.625,-43.954 h1.2 r90
D206: Assembly_top "k" at 23.125,-43.954 h1 r90; Note_top "k" at 21.625,-43.954 h1 r90; Top Overlay "K" at 20.925,-43.954 h1.2 r90
D207: Assembly_top "k" at 32.525,-43.954 h1 r90; Note_top "k" at 31.025,-43.954 h1 r90; Top Overlay "K" at 30.325,-43.954 h1.2 r90
D208: Assembly_top "k" at 41.925,-43.954 h1 r90; Note_top "k" at 40.425,-43.954 h1 r90; Top Overlay "K" at 39.725,-43.954 h1.2 r90
D209: Assembly_top "k" at 37.225,-43.954 h1 r90; Note_top "k" at 35.725,-43.954 h1 r90; Top Overlay "K" at 35.025,-43.954 h1.2 r90
D210: Assembly_top "k" at 18.425,-43.954 h1 r90; Note_top "k" at 16.925,-43.954 h1 r90; Top Overlay "K" at 16.225,-43.954 h1.2 r90
D211: Assembly_top "k" at 140.625,-33.754 h1 r90; Note_top "k" at 139.125,-33.754 h1 r90; Top Overlay "K" at 138.425,-33.754 h1.2 r90
D212: Assembly_top "k" at 135.925,-33.754 h1 r90; Note_top "k" at 134.425,-33.754 h1 r90; Top Overlay "K" at 133.725,-33.754 h1.2 r90
D213: Assembly_top "k" at 145.325,-33.754 h1 r90; Note_top "k" at 143.825,-33.754 h1 r90; Top Overlay "K" at 143.125,-33.754 h1.2 r90
D214: Assembly_top "k" at 13.725,-43.954 h1 r90; Note_top "k" at 12.225,-43.954 h1 r90; Top Overlay "K" at 11.525,-43.954 h1.2 r90
D215: Assembly_top "k" at 150.025,-33.754 h1 r90; Note_top "k" at 148.525,-33.754 h1 r90; Top Overlay "K" at 147.825,-33.754 h1.2 r90
D216: Assembly_top "k" at 46.625,-43.954 h1 r90; Note_top "k" at 45.125,-43.954 h1 r90; Top Overlay "K" at 44.425,-43.954 h1.2 r90
D217: Assembly_top "k" at 84.225,-43.954 h1 r90; Note_top "k" at 82.725,-43.954 h1 r90; Top Overlay "K" at 82.025,-43.954 h1.2 r90
D218: Assembly_top "k" at 79.525,-43.954 h1 r90; Note_top "k" at 78.025,-43.954 h1 r90; Top Overlay "K" at 77.325,-43.954 h1.2 r90
D219: Assembly_top "k" at 88.925,-43.954 h1 r90; Note_top "k" at 87.425,-43.954 h1 r90; Top Overlay "K" at 86.725,-43.954 h1.2 r90
D220: Assembly_top "k" at 98.325,-43.954 h1 r90; Note_top "k" at 96.825,-43.954 h1 r90; Top Overlay "K" at 96.125,-43.954 h1.2 r90
D221: Assembly_top "k" at 93.625,-43.954 h1 r90; Note_top "k" at 92.125,-43.954 h1 r90; Top Overlay "K" at 91.425,-43.954 h1.2 r90
D222: Assembly_top "k" at 74.825,-43.954 h1 r90; Note_top "k" at 73.325,-43.954 h1 r90; Top Overlay "K" at 72.625,-43.954 h1.2 r90
D223: Assembly_top "k" at 56.025,-43.954 h1 r90; Note_top "k" at 54.525,-43.954 h1 r90; Top Overlay "K" at 53.825,-43.954 h1.2 r90
D224: Assembly_top "k" at 70.125,-43.954 h1 r90; Note_top "k" at 68.625,-43.954 h1 r90; Top Overlay "K" at 67.925,-43.954 h1.2 r90
D225: Assembly_top "k" at 65.425,-43.954 h1 r90; Note_top "k" at 63.925,-43.954 h1 r90; Top Overlay "K" at 63.225,-43.954 h1.2 r90
D226: Assembly_top "k" at 60.725,-43.954 h1 r90; Note_top "k" at 59.225,-43.954 h1 r90; Top Overlay "K" at 58.525,-43.954 h1.2 r90
D227: Assembly_top "k" at 51.325,-43.954 h1 r90; Note_top "k" at 49.825,-43.954 h1 r90; Top Overlay "K" at 49.125,-43.954 h1.2 r90
U6: Note_top "1" at 67.325,-53.054 h1
U7: Note_top "1" at 33.08,-15.829 h1
U8: Note_top "1" at 45.73,-15.829 h1
U9: Note_top "1" at 102.72,-15.429 h1
U10: Note_top "1" at 95.17,-15.429 h1
U11: Note_top "1" at 80.07,-15.429 h1
U12: Note_top "1" at 87.62,-15.429 h1